# Altium PCB PCB1.PcbDoc (part 1 of 2)
Units mm, origin at the board's own origin, x right, y up, seen from the top; angles counter-clockwise.
Board outline 66.67 x 62.99 mm, 6 copper layers (Top Layer, Signal 1, Signal 2, GND, Power, Bottom Layer), stack 1.313 mm thick; 81 components, 107 nets, 466 pads, 129 vias.
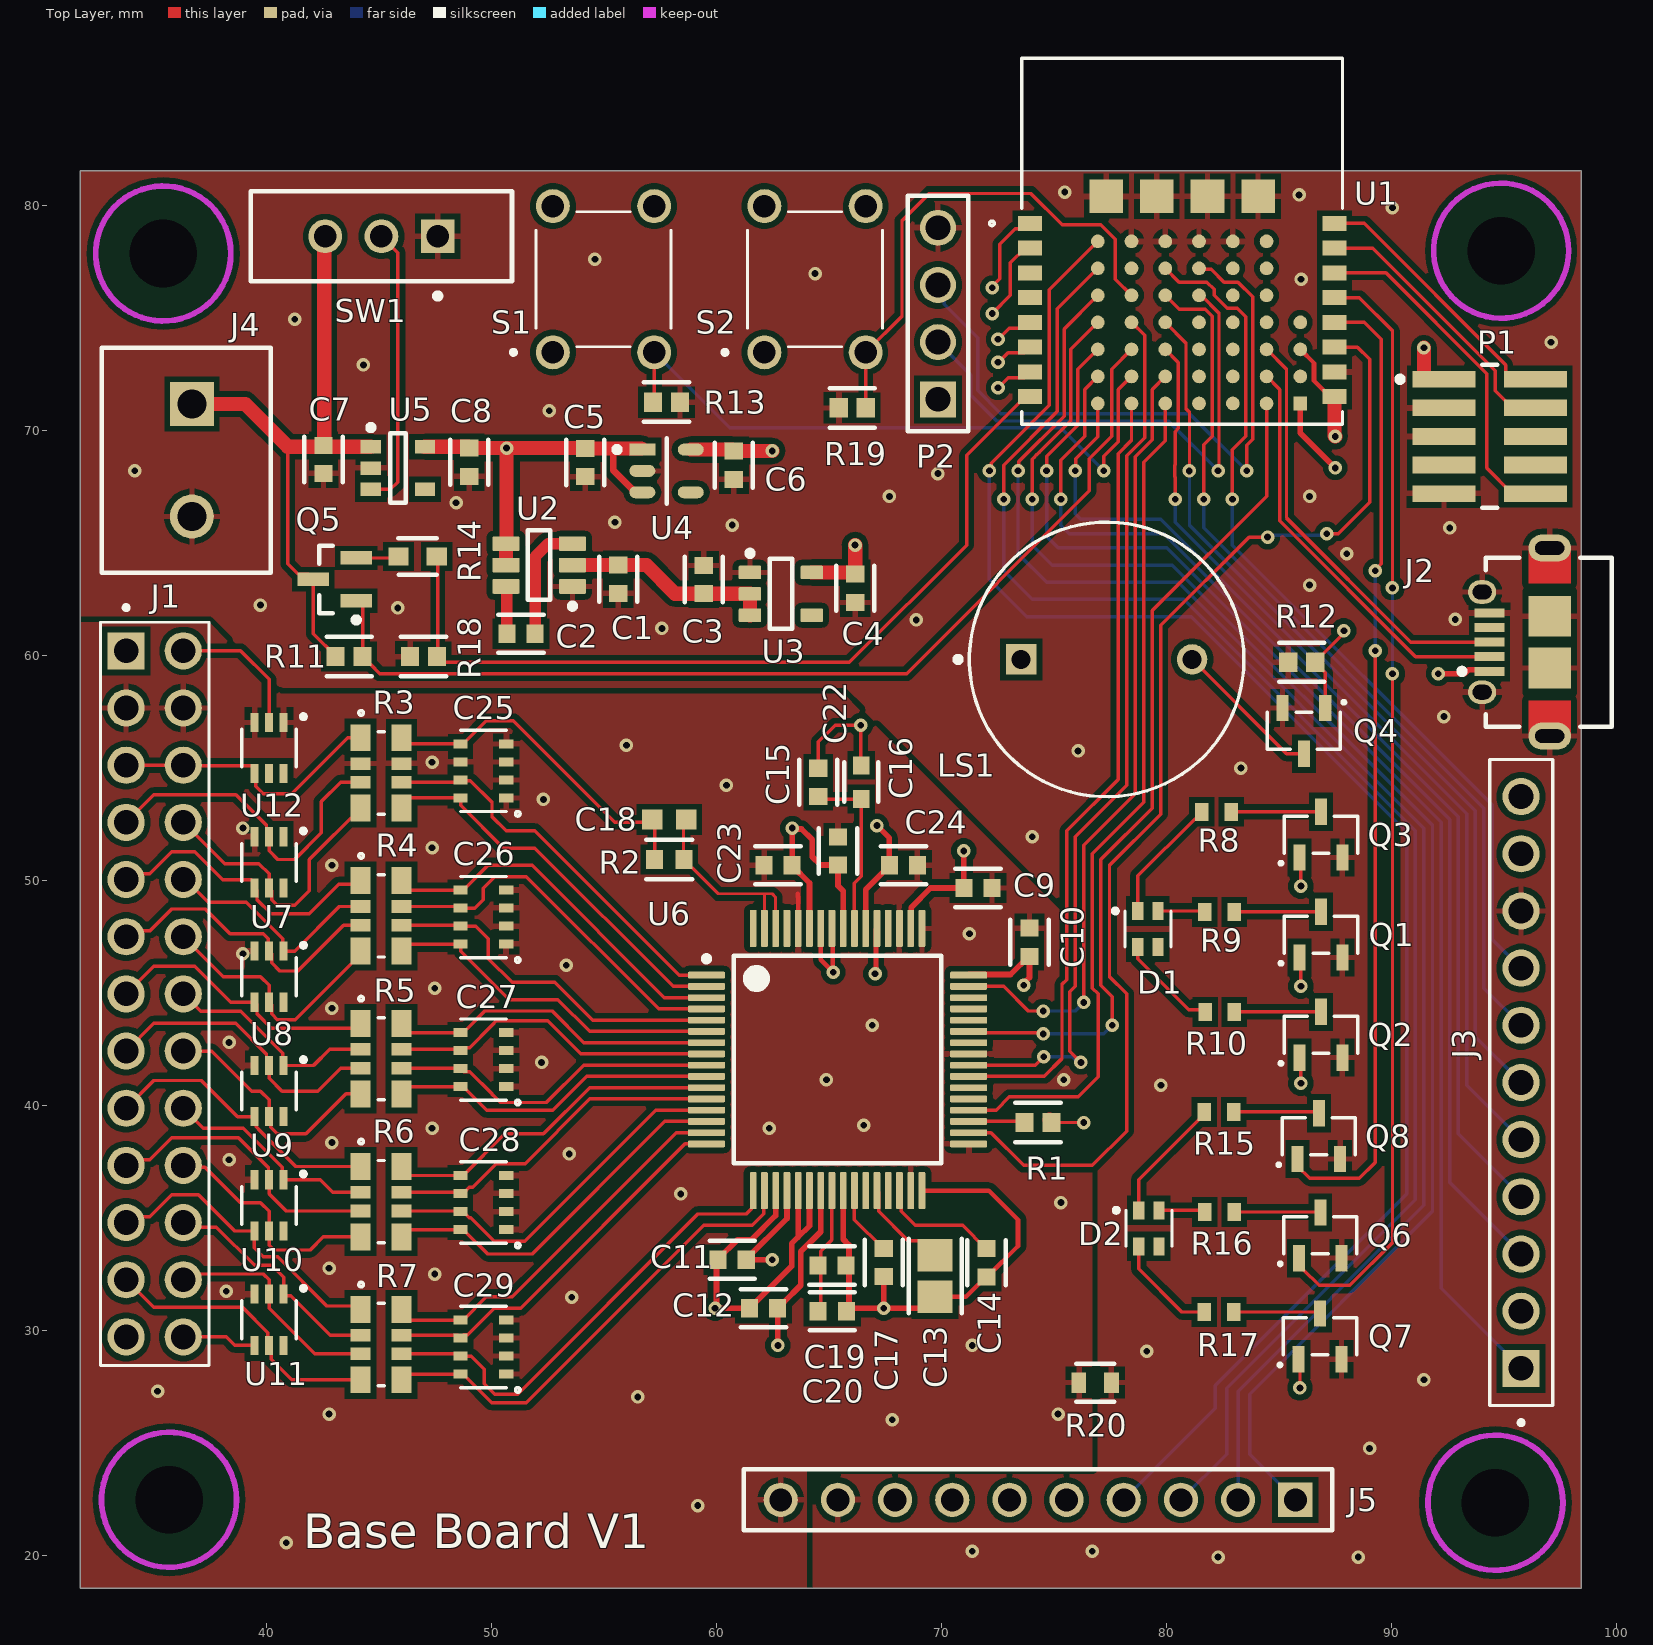
[diagram p0: Top Layer view]
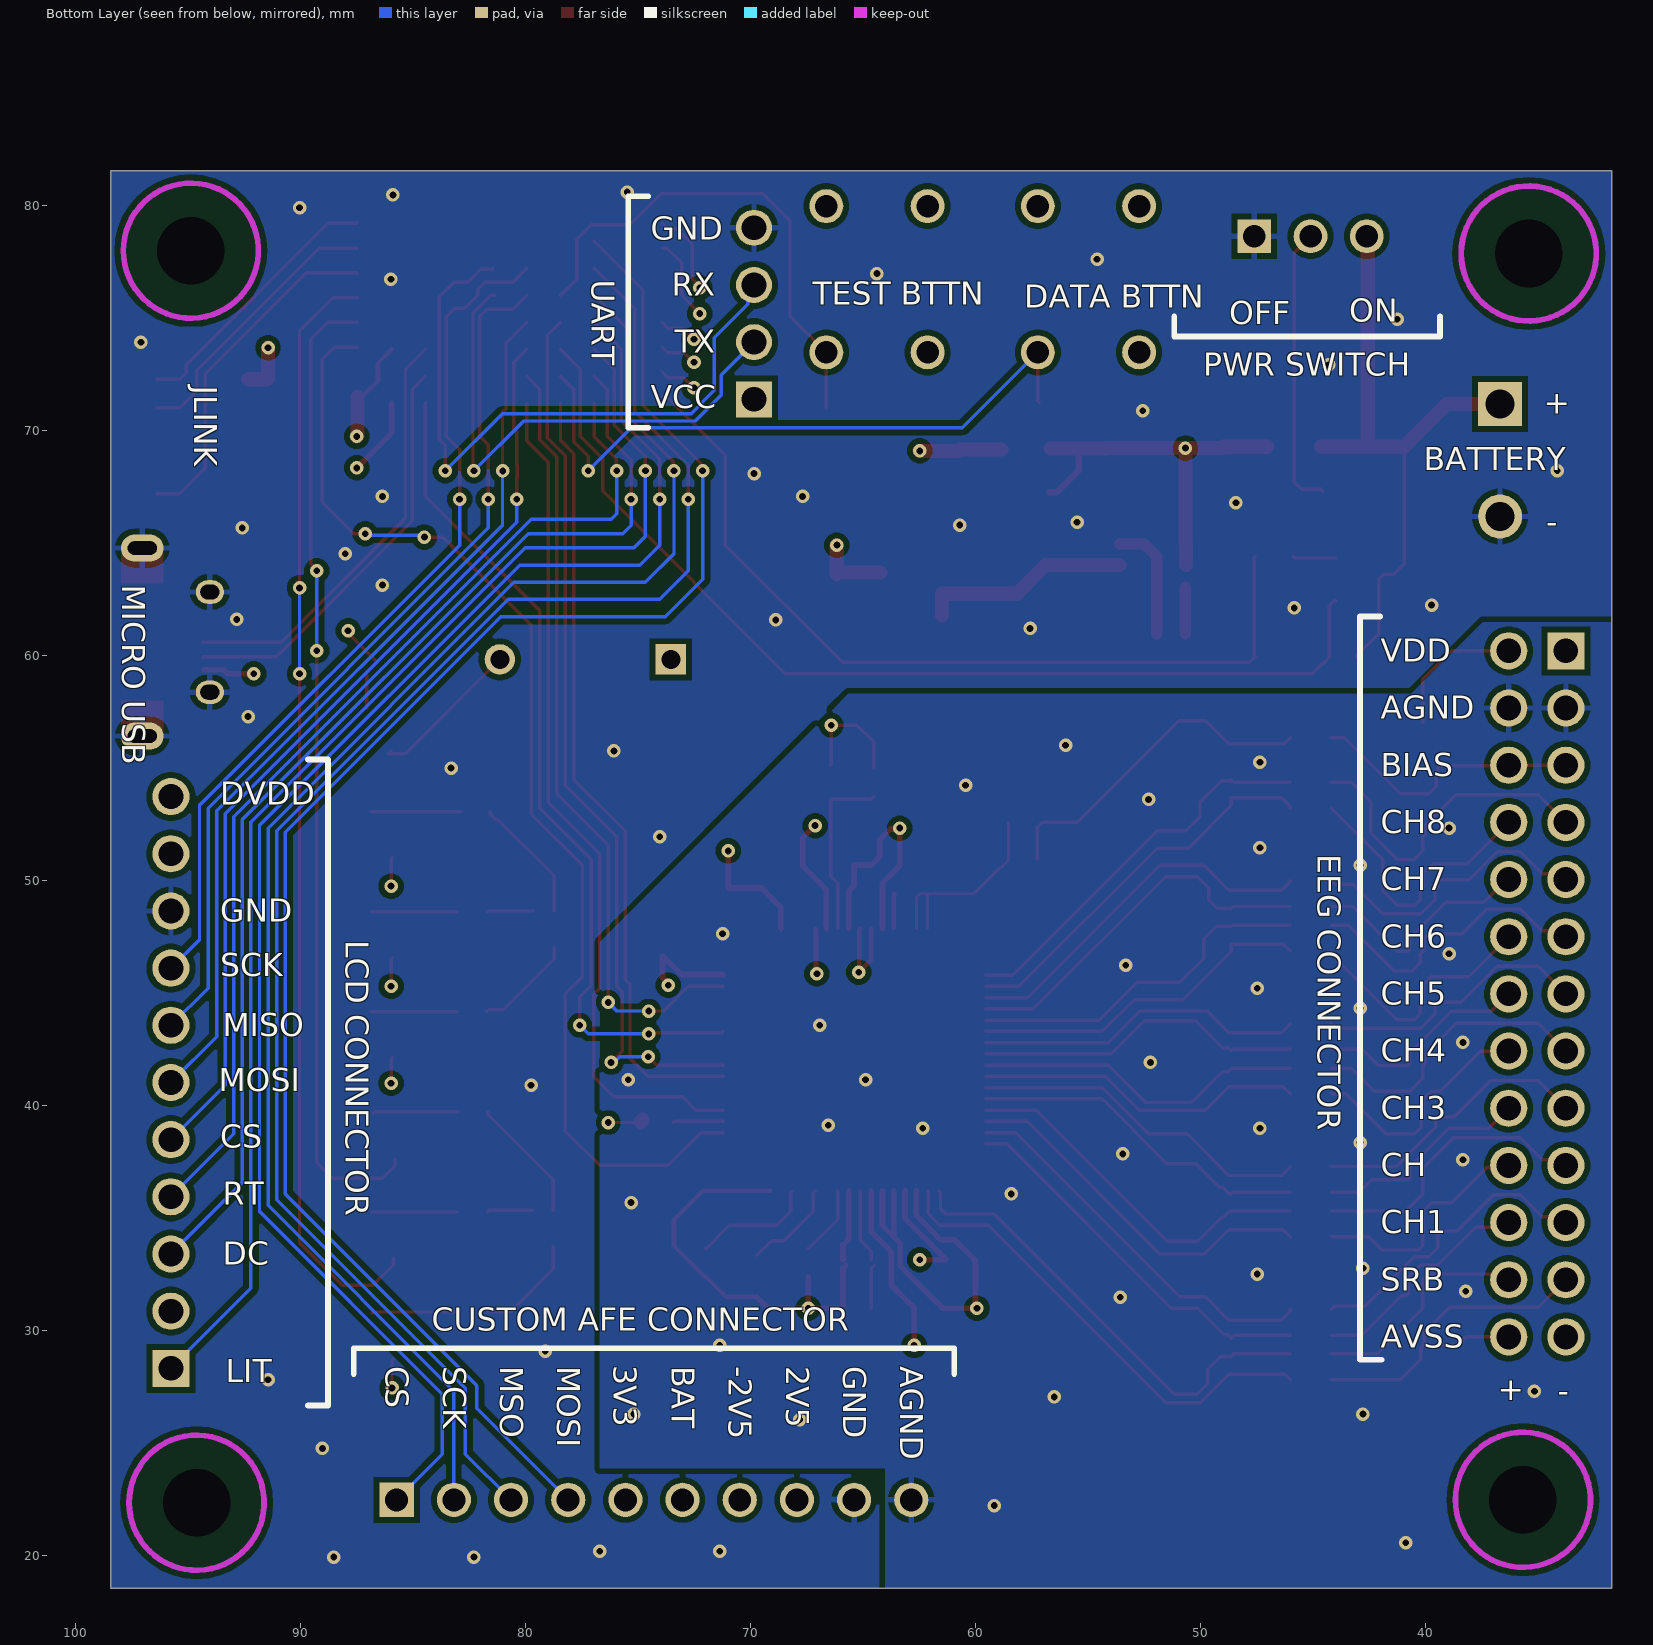
[diagram p1: Bottom Layer view, seen from below]
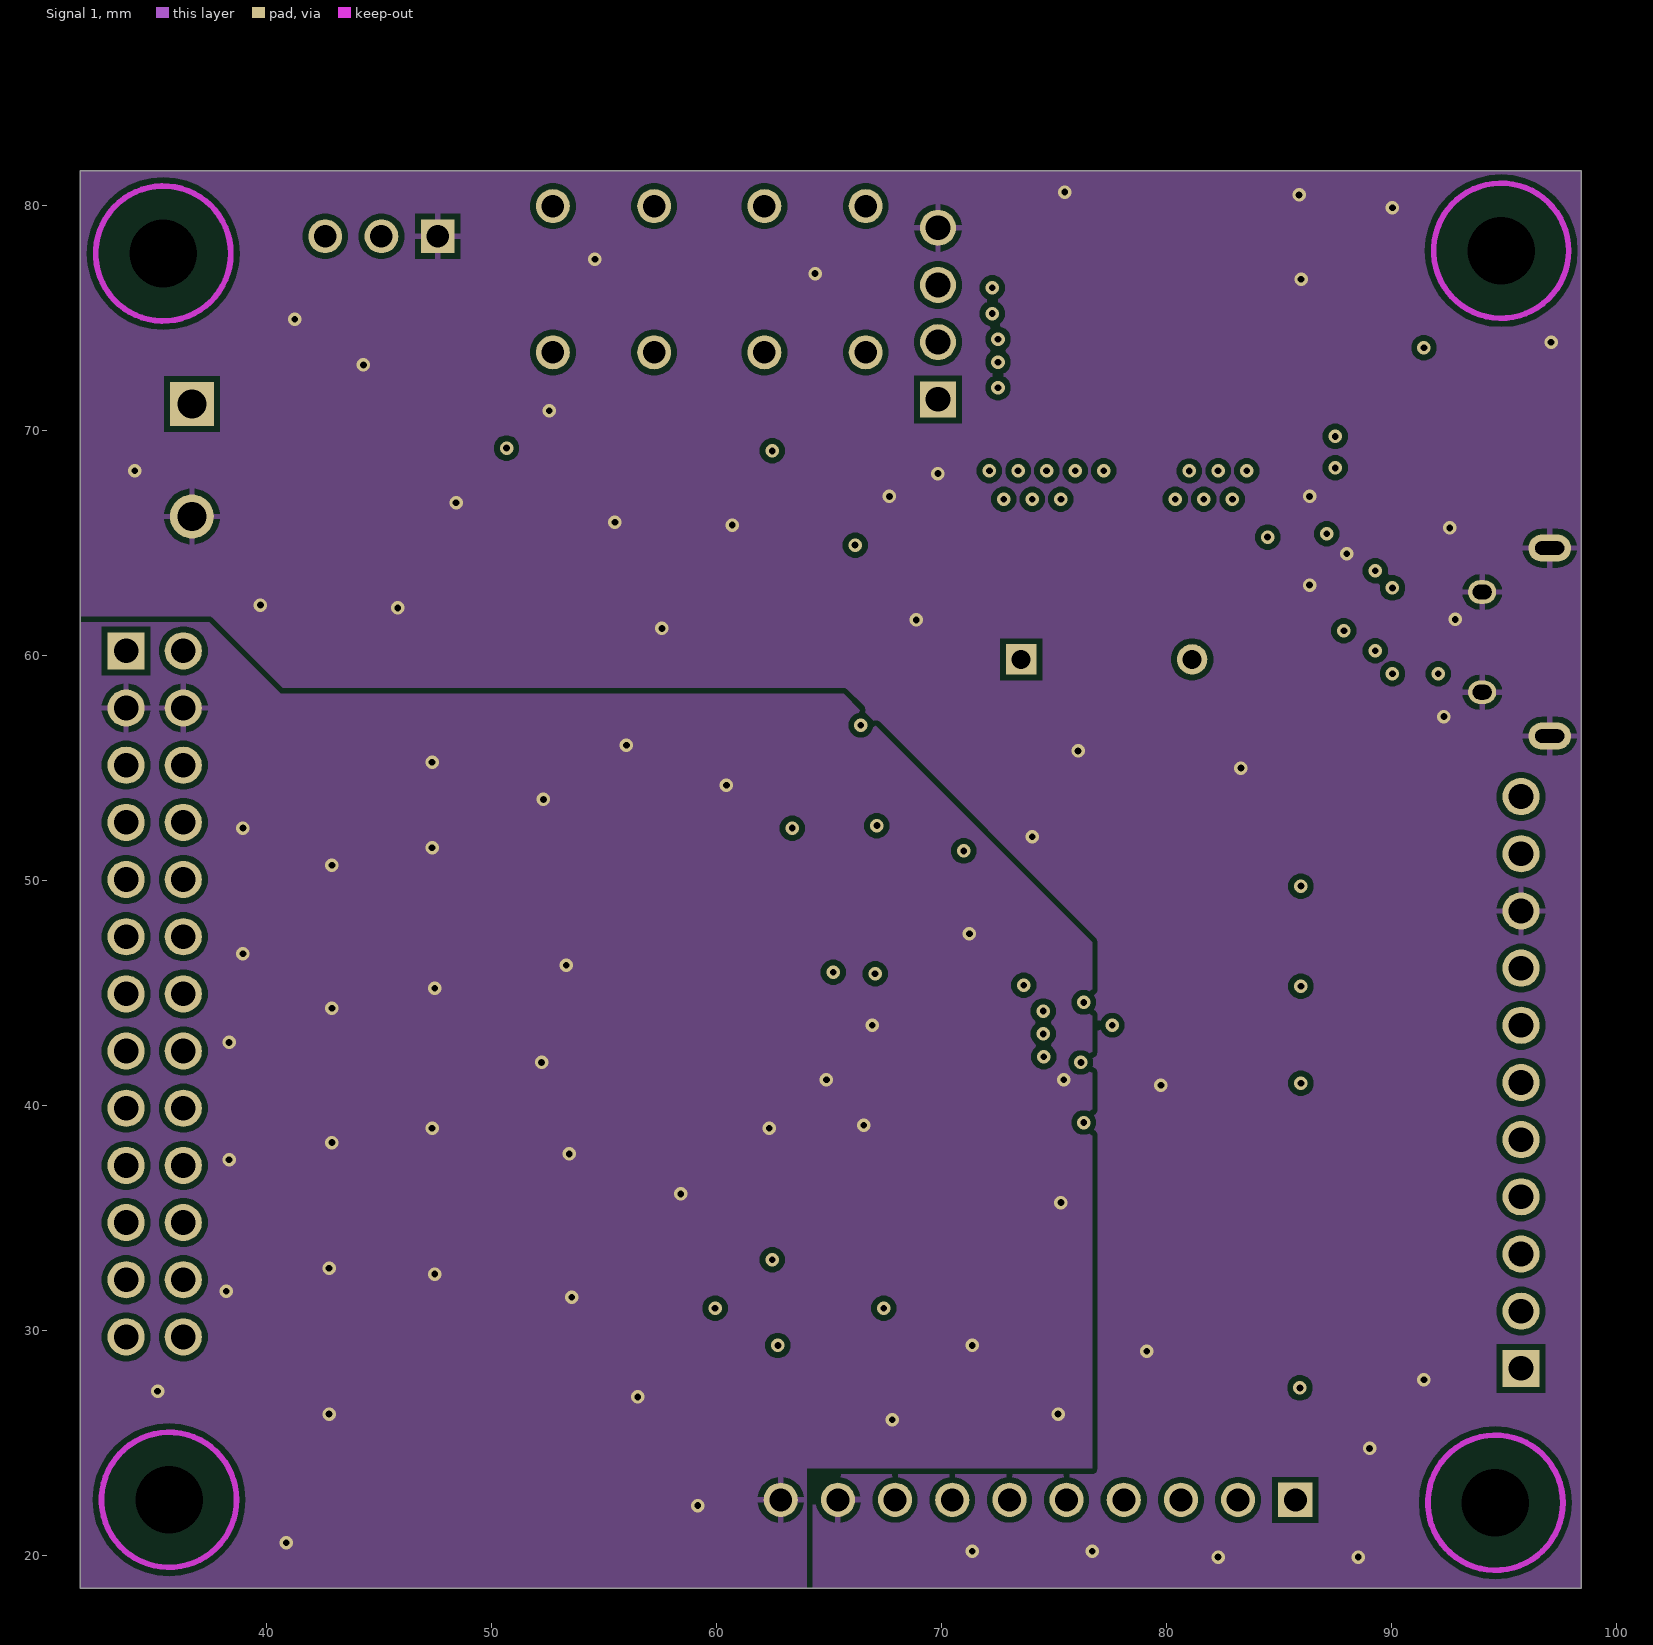
[diagram p2: Signal 1]
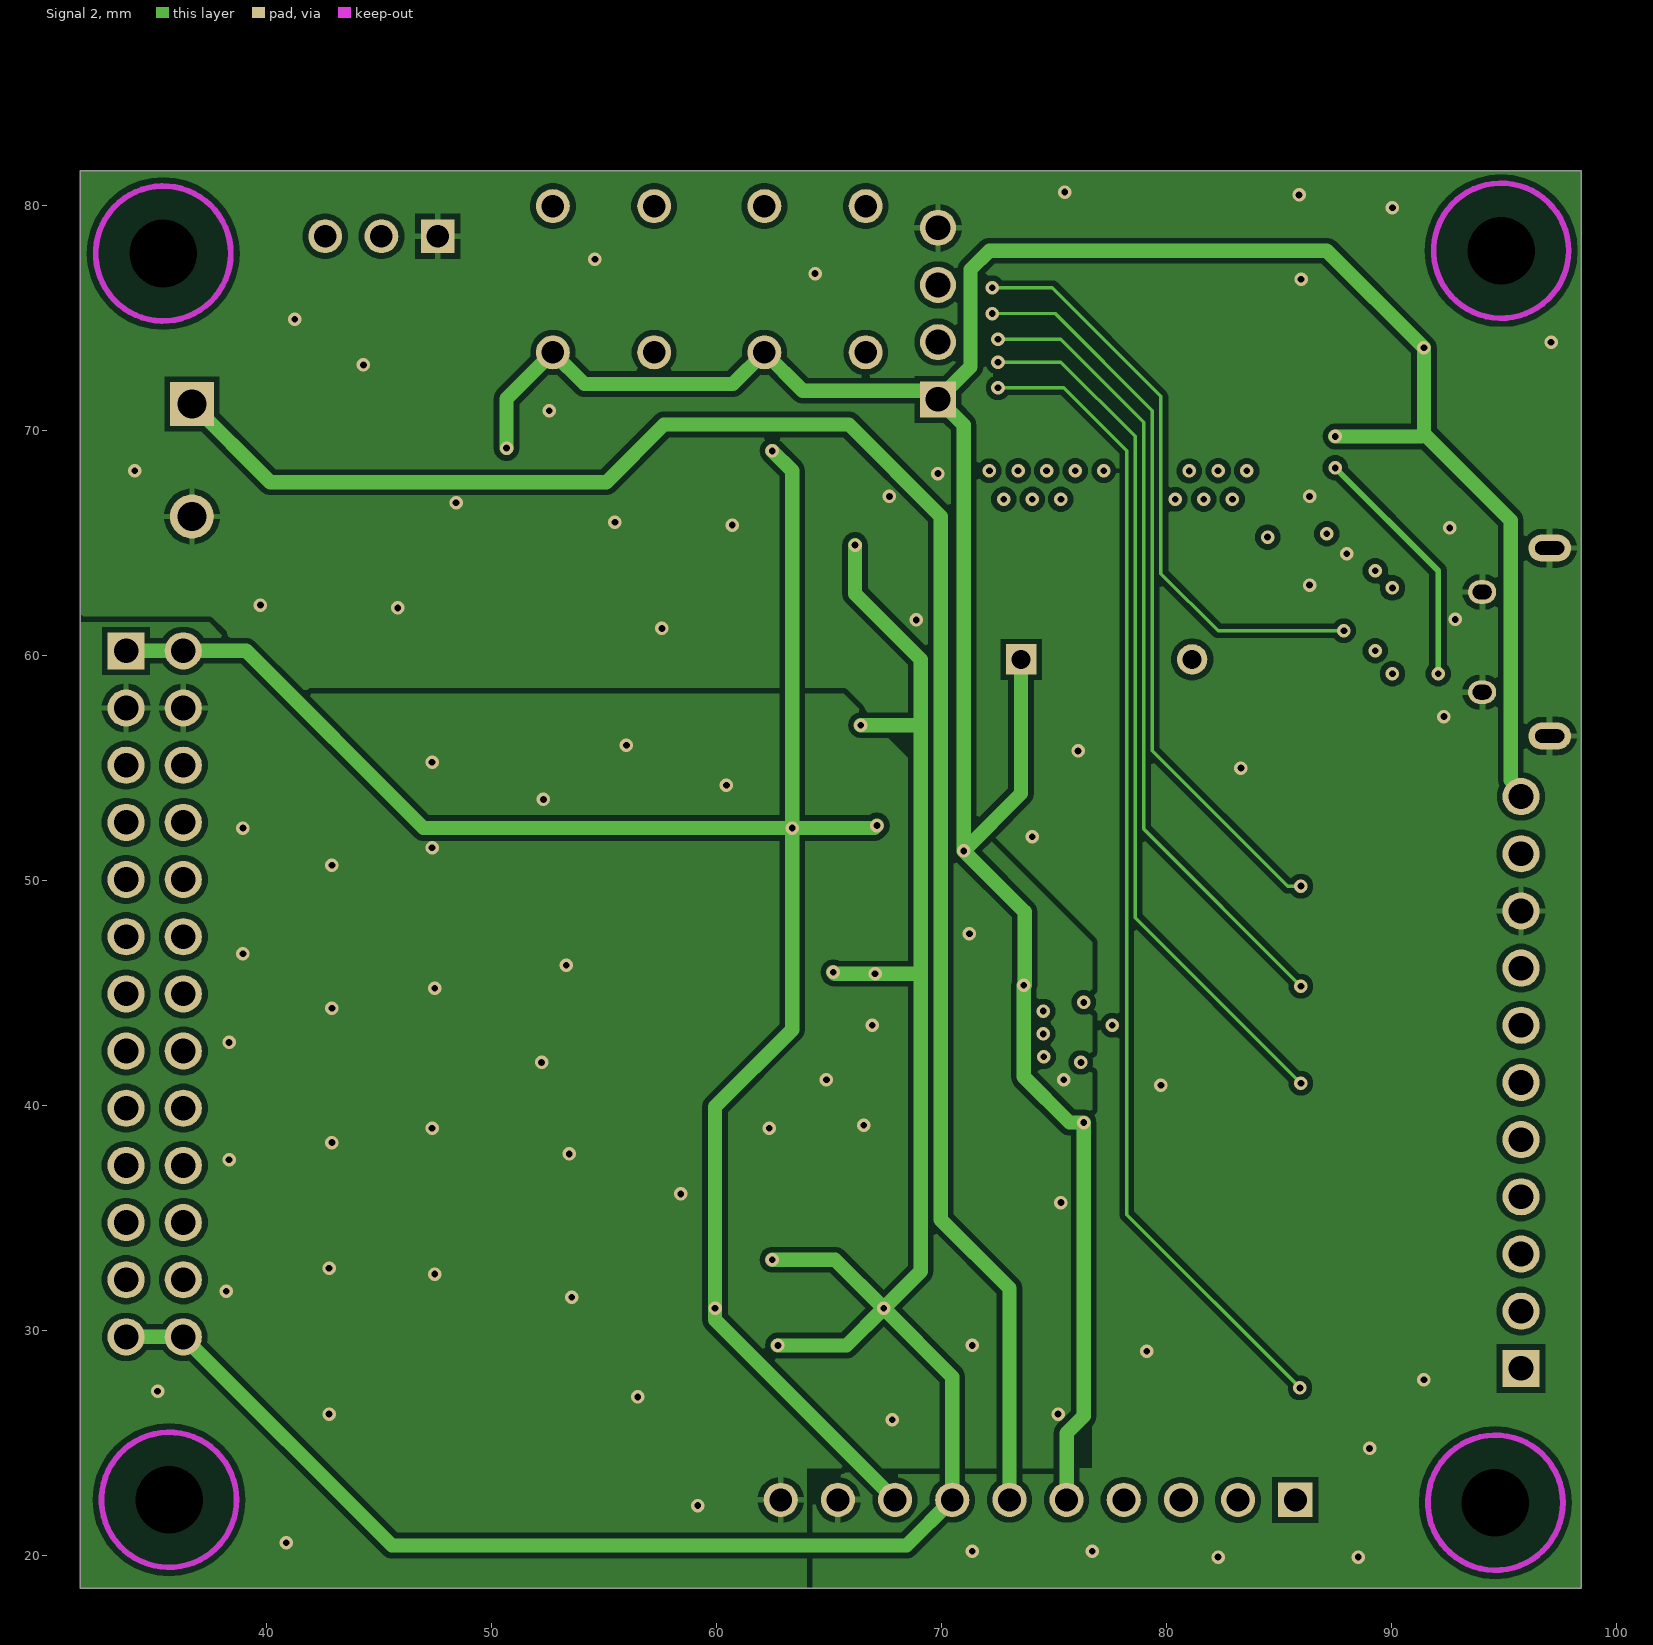
[diagram p3: Signal 2]
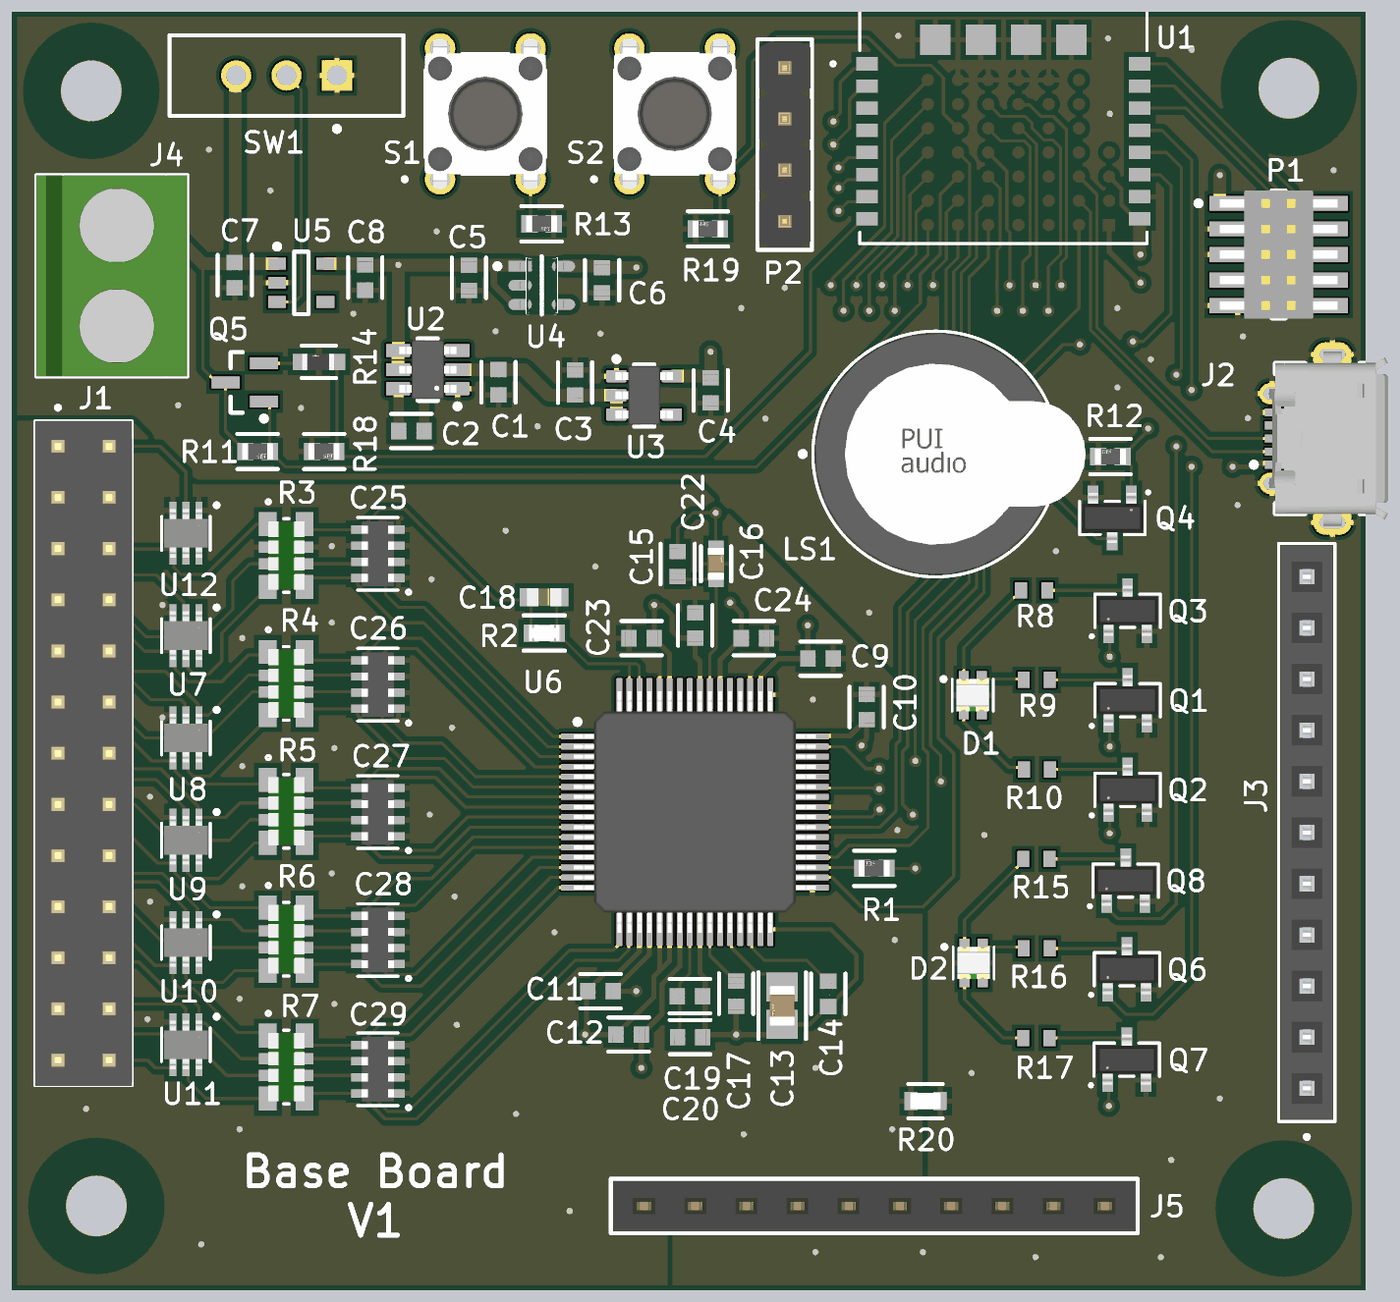
[diagram p5: 3D render of the assembled board from above, using the file's embedded part models]

## Layer stack, top to bottom
Top Solder: solder mask 0.0102, Solder Resist, Dk 3.5
Top Layer: signal copper 0.035
Dielectric 2: prepreg 0.0711, PP-006, Dk 4.1
Signal 1: signal copper 0.0356
Dielectric5: dielectric 0.32, FR-4, Dk 4.8
Signal 2: signal copper 0.0356
Dielectric4: dielectric 0.32, FR-4, Dk 4.8
GND: signal copper 0.035
Dielectric 1: dielectric 0.32, FR-4, Dk 4.8
Power: signal copper 0.035
Dielectric 3: prepreg 0.0711, PP-006, Dk 4.1
Bottom Layer: signal copper 0.035
Bottom Solder: solder mask 0.0102, Solder Resist, Dk 3.5

## Board outline
31.75,18.542 98.425,18.542 98.425,81.534 31.75,81.534

## Design rules (kind name [scope] priority, off if disabled: settings)
Clearance [All] p1: gap=0.254 ignorepadtopadclearanceinfootprint=TRUE except(0: Arc-Hole Track-Hole SMDPad-Hole THPad-Hole Via-Hole Fill-Hole Poly-Hole Region-Hole Text-Hole; 0.127: SMDPad-SMDPad; 0.152: Arc-Arc Arc-Track Track-Track; 0.2: Arc-SMDPad Track-SMDPad; 0.279: Via-Via; 0.33: Arc-THPad Track-THPad; 0.5: THPad-THPad THPad-Via)
DiffPairsRouting [All] p1: maxlimit=0.254 minlimit=0.152 mostfreqgap=0.152 toplayer_minwidth=0.152 toplayer_maxwidth=0.381 toplayer_prefwidth=0.152 midlayer1_minwidth=0.152 midlayer1_maxwidth=0.381 midlayer1_prefwidth=0.152 midlayer2_minwidth=0.152 midlayer2_maxwidth=0.381 midlayer2_prefwidth=0.152 midlayer3_minwidth=0.152 midlayer3_maxwidth=0.381 midlayer3_prefwidth=0.152 midlayer4_minwidth=0.152 midlayer4_maxwidth=0.381 midlayer4_prefwidth=0.152 bottomlayer_minwidth=0.152 bottomlayer_maxwidth=0.381 bottomlayer_prefwidth=0.152 maxuncoupledlength=12.7
HoleSize [All] p1: absolutevalues=TRUE maxlimit=6 minlimit=0.025 maxpercent=80.000 minpercent=20.000
MinimumSolderMaskSliver [All] p1: minsoldermaskwidth=0.08
PlaneConnect [All] p1: pad.planeconnectstyle=Relief pad.reliefexpansion=0.508 pad.reliefentries=4 pad.reliefconductorwidth=0.254 pad.reliefairgap=0.254 via.planeconnectstyle=Direct via.reliefexpansion=0.508 via.reliefentries=4 via.reliefconductorwidth=0.254 via.reliefairgap=0.254
PolygonConnect [All] p1: connectstyle=Relief reliefconductorwidth=0.254 reliefentries=4 polygonreliefangle="90 Angle" airgapwidth=0.254
RoutingVias [All] p1: holewidth=0.3 width=0.6 viastyle="Through Hole" minholewidth=0.3 minwidth=0.6 maxholewidth=6.3 maxwidth=10
SolderMaskExpansion [All] p1: expansion=0.102 istentingtop=FALSE
Width [All] p1: maxlimit=1.27 minlimit=0.102 preferedwidth=0.152
26 further rules are at their usual default settings.

## Classes and differential pairs
component class Power: C1 C2 C3 C4 C5 C6 C7 C8 U2 U3 U4 U5
component class Peripherals: D1 D2 J2 J3 J4 LS1 P1 P2 Q1 Q2 Q3 Q4 Q5 Q6 Q7 Q8 R8 R9 R10 R11 R12 R13 R14 R15 R16 R17 R18 R19 S1 S2 SW1
component class MCU: U1
component class "EEG Inputs": C25 C26 C27 C28 C29 J1 R3 R4 R5 R6 R7 U7 U8 U9 U10 U11 U12
component class AFE: C9 C10 C11 C12 C13 C14 C15 C16 C17 C18 C19 C20 C22 C23 C24 J5 R1 R2 R20 U6
differential pair D: +D_P -D_N

## Components (designator, comment, footprint, x,y, rotation, side; value= is the part's Value field where it differs from the comment)
C1 "CL10A106MQ8NNNC" FP-CL10-IPC_C 55.642,63.381 r270 top
C2 "CL10A106MQ8NNNC" FP-CL10-IPC_C 51.324,60.96 r0 top
C3 "CL10A105KA8NNNC" FP-CL10-IPC_C 59.444,63.365 r90 top
C4 "CL10A105KA8NNNC" FP-CL10-IPC_C 66.175,62.976 r270 top
C5 "CL10A105KA8NNNC" FP-CL10-IPC_C 54.178,68.564 r270 top
C6 "CL10A105KA8NNNC" FP-CL10-IPC_C 60.782,68.445 r270 top
C7 "CL10A105KA8NNNC" FP-CL10-IPC_C 42.553,68.699 r270 top
C8 "CL10A105KA8NNNC" FP-CL10-IPC_C 49.03,68.58 r270 top
C9 "CL10A105KA8NNNC" FP-CL10-IPC_C 71.628,49.657 r0 top
C10 "CL10A105KA8NNNC" FP-CL10-IPC_C 73.914,47.252 r90 top
C11 "CL10A105KA8NNNC" FP-CL10-IPC_C 60.706,33.147 r0 top
C12 "CL10A105KA8NNNC" FP-CL10-IPC_C 62.103,30.988 r0 top
C13 "GRM21BR60E107ME15K" FP-GRM21B-0_2-e0_2_0_7-IPC_A 69.723,32.422 r270 top
C14 "CL10A105KA8NNNC" FP-CL10-IPC_C 72.009,33.012 r270 top
C15 "CL10A105KA8NNNC" FP-CL10-IPC_C 64.535,54.356 r90 top
C16 "KGM15BR71H104JT" FP-0603-L_1_6_0_15-W_0_81-MFG 66.44,54.364 r90 top
C17 "CL10A105KA8NNNC" FP-CL10-IPC_C 67.437,33.02 r270 top
C18 "0603N102F500CT" CAP_0603_S_WAL 57.912,52.705 r180 top
C19 "CL10A106MQ8NNNC" FP-CL10-IPC_C 65.143,32.893 r0 top
C20 "CL10A105KA8NNNC" FP-CL10-IPC_C 65.151,30.861 r0 top
C22 "CL10A105KA8NNNC" FP-CL10-IPC_C 65.405,51.308 r90 top
C23 "CL10A105KA8NNNC" FP-CL10-IPC_C 62.746,50.673 r180 top
C24 "CL10A105KA8NNNC" FP-CL10-IPC_C 68.318,50.673 r0 top
C25 "CA0612KRX7R9BB102" CAP_CA0612_3P2X1P6_YAG 49.657,54.864 r180 top
C26 "CA0612KRX7R9BB102" CAP_CA0612_3P2X1P6_YAG 49.657,48.368 r180 top
C27 "CA0612KRX7R9BB102" CAP_CA0612_3P2X1P6_YAG 49.657,42.037 r180 top
C28 "CA0612KRX7R9BB102" CAP_CA0612_3P2X1P6_YAG 49.657,35.687 r180 top
C29 "CA0612KRX7R9BB102" CAP_CA0612_3P2X1P6_YAG 49.657,29.267 r180 top
D1 "B38G3RGB-10D0003H2U1930" LED_B38G3RGB-10D0003H2U1930 79.179,47.841 r0 top
D2 "B38G3RGB-10D0003H2U1930" LED_B38G3RGB-10D0003H2U1930 79.222,34.544 r0 top
J1 "77313-824-26LF" AMPHENOL_77313-824-26LF 35.052,44.958 r270 top
J2 "47589-0001" MOLX-47589-0001_V 95.528,60.586 r90 top
J3 "PPTC111LFBN-RC" CONN11_PPPN111_SUL 95.758,28.321 r90 top
J4 "691137710002" 691137710002 36.453,68.667 r270 top
J5 "RS1-10-G" 61301011821 74.295,22.479 r180 top
LS1 "AI-1223-TWT-3V-2-R" FP-AI-1223-TWT-3V-2-R-MFG 77.343,59.817 r0 top
P1 "FTSH-105-01-L-DV" SMTC-FTSH-105-01-L-DV_V 94.361,69.723 r270 top
P2 "61300411121" 61300411121 69.85,75.184 r90 top
Q1 "NX6008NBKR" NX6008NBKR_NEX 86.865,47.587 r0 top
Q2 "NX6008NBKR" NX6008NBKR_NEX 86.865,43.142 r0 top
Q3 "NX6008NBKR" NX6008NBKR_NEX 86.865,52.032 r0 top
Q4 "NX6008NBKR" NX6008NBKR_NEX 86.106,56.642 r180 top
Q5 "BSS84AK,215" NXP-SOT23_N 43.053,63.373 r180 top
Q6 "NX6008NBKR" NX6008NBKR_NEX 86.835,34.233 r0 top
Q7 "NX6008NBKR" NX6008NBKR_NEX 86.822,29.743 r0 top
Q8 "NX6008NBKR" NX6008NBKR_NEX 86.769,38.633 r0 top
R1 "RMCF0603FT100K" FP-RMCF0603-IPC_C 74.295,39.243 r180 top
R2 "ERJ-3EKF1004V" FP-ERJ3EK-IPC_C 57.912,50.927 r180 top
R3 "CAY16-2201F4LF" CAY16_BRN 45.11,54.775 r0 top
R4 "CAY16-2201F4LF" CAY16_BRN 45.11,48.425 r0 top
R5 "CAY16-2201F4LF" CAY16_BRN 45.11,42.075 r0 top
R6 "CAY16-2201F4LF" CAY16_BRN 45.11,35.725 r0 top
R7 "CAY16-2201F4LF" CAY16_BRN 45.11,29.375 r0 top
R8 "RC0603JR-0762RL" RESC1608X55X25LL10T15 82.227,53.048 r180 top
R9 "RC0603JR-0762RL" RESC1608X55X25LL10T15 82.354,48.603 r180 top
R10 "RC0603FR-07261RL" RESC1608X55X25LL10T15 82.369,44.158 r180 top
R11 "RMCF0603FT100K" FP-RMCF0603-IPC_C 43.688,59.944 r0 top
R12 "RMCF0603FT100K" FP-RMCF0603-IPC_C 86.013,59.69 r180 top
R13 "RMCF0603FT100K" FP-RMCF0603-IPC_C 57.785,71.247 r0 top
R14 "RT0603FRE07127KL" FP-RT0603-MFG 46.736,64.389 r180 top value=127KΩ
R15 "RC0603JR-0762RL" RESC1608X55X25LL10T15 82.339,39.713 r180 top
R16 "RC0603JR-0762RL" RESC1608X55X25LL10T15 82.354,35.268 r180 top
R17 "RC0603FR-07261RL" RESC1608X55X25LL10T15 82.339,30.823 r180 top
R18 "RMCF0603FT100K" FP-RMCF0603-IPC_C 46.99,59.944 r0 top
R19 "RMCF0603FT100K" FP-RMCF0603-IPC_C 66.04,70.993 r180 top
R20 "RMCF0603ZT0R00" FP-RMCF0603-MFG 76.835,27.686 r180 top value=0mΩ
S1 "TS02-66-70-BK-160-LCR-D" SW_TS02-66-70-BK-160-LCR-D 54.991,76.708 r90 top
S2 "TS02-66-70-BK-160-LCR-D" SW_TS02-66-70-BK-160-LCR-D 64.389,76.708 r90 top
SW1 "EG1218" ESWI-EG1218_V 45.125,78.613 r180 top
U1 "BT40" BT40E_FAN_FNL 80.699,78.391 r0 top
U2 "LM2664M6X/NOPB" DBV0006A_M 52.135,64.008 r180 top
U3 "TPS72325DBVR" DBV0005A_N 62.873,62.73 r0 top
U4 "MIC5504-2.5YM5-TR" FP-SOT23-5LD-PL-1-IPC_C 57.793,68.191 r0 top
U5 "MCP1754T-3302E/OT" MCHP-SOT-23-OT5_L 45.855,68.318 r0 top
U6 "ADS1299IPAGR" PAG0064A_M 65.388,42.041 r0 top
U7 "TPD4E1B06DCKR" DCK6_TEX 40.132,50.8 r270 top
U8 "TPD4E1B06DCKR" DCK6_TEX 40.132,45.72 r270 top
U9 "TPD4E1B06DCKR" DCK6_TEX 40.132,40.64 r270 top
U10 "TPD4E1B06DCKR" DCK6_TEX 40.132,35.56 r270 top
U11 "TPD4E1B06DCKR" DCK6_TEX 40.132,30.48 r270 top
U12 "TPD4E1B06DCKR" DCK6_TEX 40.132,55.88 r270 top

## Footprints (in the part's own frame and the unit in brackets; to place one, negate y for a bottom-side part, rotate by r counter-clockwise, add the part's x,y. Pads: shape width x height; smd on the part's side, far side on the other; paste and mask are expansions set on the pad)
61300411121 [mm] "Pin Header, pitch 2.54 mm, THT, Vertical, single row, 4p"
  rect 1.6x1.6 hole 1.1: 1(-3.81,0)
  round 1.6 hole 1.1: 2(-1.27,0) 3(1.27,0) 4(3.81,0)
  silkscreen extent -5.23,-1.35 5.23,1.35, body extent -5.08,-1.27 5.08,1.27, height 8.57
61301011821 [mm] "Socket Header, Pitch 2.54 mm, THT, Vertical, single row, 10p"
  rect 1.52x1.52 hole 1.02: 1(-11.43,0)
  round 1.52 hole 1.02: 2(-8.89,0) 3(-6.35,0) 4(-3.81,0) 5(-1.27,0) 6(1.27,0) 7(3.81,0) 8(6.35,0) 9(8.89,0) 10(11.43,0)
  silkscreen extent -13.08,-1.35 13.08,1.35, body extent -12.95,-1.25 12.95,1.25, height 8.55
691137710002 [mm] "Horizontal Cable Entry with Pressure Clamp, pitch 5mm, 02p"
  rect 1.95x1.95 hole 1.3: 1(-2.5,0.25)
  round 1.95 hole 1.3: 2(2.5,0.25)
  silkscreen extent -5,-3.75 5,3.75, body extent -5,-3.75 5,3.75, height 11.6
AMPHENOL_77313-824-26LF [mm]
  rect 1.65x1.65 hole 1.1: 01(-15.24,-1.27)
  round 1.65 hole 1.1: 02(-15.24,1.27) 03(-12.7,-1.27) 04(-12.7,1.27) 05(-10.16,-1.27) 06(-10.16,1.27) 07(-7.62,-1.27) 08(-7.62,1.27) 09(-5.08,-1.27) 10(-5.08,1.27) 11(-2.54,-1.27) 12(-2.54,1.27) 13(0,-1.27) 14(0,1.27) 15(2.54,-1.27) 16(2.54,1.27) 17(5.08,-1.27) 18(5.08,1.27) 19(7.62,-1.27) 20(7.62,1.27) 21(10.16,-1.27) 22(10.16,1.27) 23(12.7,-1.27) 24(12.7,1.27) 25(15.24,-1.27) 26(15.24,1.27)
  silkscreen extent -17.26,-2.41 16.51,2.41, body extent -16.51,-2.41 16.51,2.41, height 9.3
BT40E_FAN_FNL [mil]
  rect 42x26 smd paste+0 mask+0: 1(-266.5,31.5) 2(-266.5,-11.81) 3(-266.5,-55.12) 4(-266.5,-98.43) 5(-266.5,-141.73) 6(-266.5,-185.04) 7(-266.5,-228.35) 8(-266.5,-271.65) 9(266.5,-271.65) 10(266.5,-228.35) 11(266.5,-185.04) 12(266.5,-141.73) 13(266.5,-98.43) 14(266.5,-55.12) 15(266.5,-11.81) 16(266.5,31.5)
  round 24 smd paste-12 mask-12: A0(-88.58,0) A1(-88.58,-47.24) A2(-88.58,-94.49) A3(-88.58,-141.73) A4(-88.58,-188.98) A5(-88.58,-236.22) A6(-88.58,-283.46) B0(-29.53,0) B1(-29.53,-47.24) B2(-29.53,-94.49) B3(-29.53,-141.73) B4(-29.53,-188.98) B5(-29.53,-236.22) B6(-29.53,-283.46) C0(29.53,0) C1(29.53,-47.24) C2(29.53,-94.49) C3(29.53,-141.73) C4(29.53,-188.98) C5(29.53,-236.22) C6(29.53,-283.46) D0(88.58,0) D1(88.58,-47.24) D2(88.58,-94.49) D3(88.58,-141.73) D4(88.58,-188.98) D5(88.58,-236.22) D6(88.58,-283.46) E0(147.64,0) E1(147.64,-47.24) E2(147.64,-94.49) E3(147.64,-141.73) E4(147.64,-188.98) E5(147.64,-236.22) E6(147.64,-283.46) F3(206.69,-141.73) F4(206.69,-188.98) F5(206.69,-236.22) Z0(-147.64,0) Z1(-147.64,-47.24) Z2(-147.64,-94.49) Z3(-147.64,-141.73) Z4(-147.64,-188.98) Z5(-147.64,-236.22) Z6(-147.64,-283.46)
  rect 24x24 smd paste-12 mask-12: F6(206.69,-283.46)
  rect 59x59 smd paste+0 mask+0: H0(-132.87,78.74) H1(-44.29,78.74) H2(44.29,78.74) H3(132.87,78.74)
  silkscreen extent -337,-320 280,320, body extent -280,-320 280,320, height 79
CAP_0603_S_WAL [mil]
  rect 36x35 smd paste+0 mask+0: 1(-29.5,0) 2(29.5,0)
  body extent -34,-17 34,17, height 34
CAP_CA0612_3P2X1P6_YAG [mil]
  rect 25x16 smd paste+0 mask+0: 1(-40,47.24) 2(-40,15.75) 3(-40,-15.75) 4(-40,-47.24) 5(40,-47.24) 6(40,-15.75) 7(40,15.75) 8(40,47.24)
  silkscreen extent -64,-71 40,79, body extent -31,-63 31,63, height 35
CAY16_BRN [mil]
  rect 35x47 smd paste+0 mask+0: 1(-36,61.5) 4(-36,-61.5) 5(36,-61.5) 8(36,61.5)
  rect 35x22 smd paste+0 mask+0: 2(-36,16.33) 3(-36,-16.33) 6(36,-16.33) 7(36,16.33)
  silkscreen extent -39,-72 5,109, body extent -36,-67 36,67, height 24
CONN11_PPPN111_SUL [mm]
  rect 1.65x1.65 hole 1.1 paste-2539.97: 1(0,0)
  round 1.65 hole 1.1 paste-2539.97: 2(2.54,0) 3(5.08,0) 4(7.62,0) 5(10.16,0) 6(12.7,0) 7(15.24,0) 8(17.78,0) 9(20.32,0) 10(22.86,0) 11(25.4,0)
  silkscreen extent -2.51,-1.4 27.05,1.4, body extent -1.52,-1.27 26.92,1.27, height 8.51
DBV0005A_N [mm] "SOT23, 5-Leads, Body 3.05x1.75mm, Pitch 0.95mm, IPC Medium Density"
  rrect17% 1x0.6 smd: 1(-1.375,0.95) 2(-1.375,0) 3(-1.375,-0.95) 4(1.375,-0.95) 5(1.375,0.95)
  silkscreen extent -1.5,-1.55 0.5,1.92, body extent -1.42,-1.46 1.42,1.46, height 1.08
DBV0006A_M [mm] "SOT23, 6-Leads, Body 3.05x1.75mm, Pitch 0.95mm, IPC Low Density"
  rrect15% 1.2x0.65 smd: 1(-1.475,0.95) 2(-1.475,0) 3(-1.475,-0.95) 4(1.475,-0.95) 5(1.475,0) 6(1.475,0.95)
  silkscreen extent -1.6,-1.55 0.5,1.95, body extent -1.42,-1.46 1.42,1.46, height 1.11
DCK6_TEX [mil]
  rect 33.5x14 smd paste+0 mask+0: 1(-44.75,25.59) 2(-44.75,0) 3(-44.75,-25.59) 4(44.75,-25.59) 5(44.75,0) 6(44.75,25.59)
  silkscreen extent -59,-48 33,64, body extent -48,-43 48,43, height 43
ESWI-EG1218_V [mm] "THD, 3-Leads, Body 11.6x4mm, Pitch 2.5mm"
  rect 1.5x1.5 hole 1: 1(-2.5,0)
  round 1.5 hole 1: 2(0,0) 3(2.5,0)
  silkscreen extent -5.8,-2 5.8,2.77, body extent -5.8,-2 5.8,2, height 7.4
FP-0603-L_1_6_0_15-W_0_81-MFG [mm]
  rect 0.8x0.75 smd paste+0 mask+0: 1(-0.75,0) 2(0.75,0)
  silkscreen extent -0.87,-0.75 0.87,0.75, body extent -1.25,-0.58 1.25,0.58, height 0.25
FP-AI-1223-TWT-3V-2-R-MFG [mm]
  rect 1.35x1.35 hole 0.85 paste-2539.97 mask+0: 1(-3.8,0)
  round 1.35 hole 0.85 paste-2539.97 mask+0: 2(3.8,0)
  silkscreen extent -6.72,-6.1 6.1,6.1, body extent -6.2,-6.2 6.2,6.2, height 0.25
FP-CL10-IPC_C [mm]
  rect 0.758x0.812 smd paste+0 mask+0: 1(-0.627,0) 2(0.627,0)
  silkscreen extent -1.01,-0.85 1.01,0.85, body extent -1.11,-0.55 1.11,0.55, height 0.25
FP-ERJ3EK-IPC_C [mm]
  rect 0.757x0.862 smd paste+0 mask+0: 1(-0.651,0) 2(0.651,0)
  silkscreen extent -1.03,-0.87 1.03,0.87, body extent -1.13,-0.58 1.13,0.58, height 0.25
FP-GRM21B-0_2-e0_2_0_7-IPC_A [mm]
  rect 1.455x1.556 smd paste+0 mask+0: 1(-0.926,0) 2(0.926,0)
  silkscreen extent -1.65,-1.18 1.65,1.18, body extent -2.15,-1.28 2.15,1.28, height 0.25
FP-RMCF0603-IPC_C [mm]
  rect 0.806x0.858 smd paste+0 mask+0: 1(-0.601,0) 2(0.601,0)
  silkscreen extent -1,-0.87 1,0.87, body extent -1.1,-0.58 1.1,0.58, height 0.25
FP-RMCF0603-MFG [mm]
  rect 0.65x0.9 smd paste+0 mask+0: 1(-0.725,0) 2(0.725,0)
  silkscreen extent -0.85,-0.85 0.85,0.85, body extent -1.15,-0.58 1.15,0.58, height 0.25
FP-RT0603-MFG [mm]
  rect 0.9x0.8 smd paste+0 mask+0: 1(-0.85,0) 2(0.85,0)
  silkscreen extent -0.85,-0.81 0.86,0.8, body extent -1.4,-0.55 1.4,0.55, height 0.25
FP-SOT23-5LD-PL-1-IPC_C [mm]
  rect 1.156x0.53 smd paste+0 mask+0: 1(-1.075,0.95)
  rrect100% 1.156x0.53 smd paste+0 mask+0: 2(-1.075,0) 3(-1.075,-0.95) 4(1.075,-0.95) 5(1.075,0.95)
  silkscreen extent -2.33,-1.45 0,1.45, body extent -1.75,-1.55 1.75,1.55, height 0.25
LED_B38G3RGB-10D0003H2U1930 [mm]
  rect 0.5x0.8 smd: 1(-0.45,0.8) 2(0.45,0.8) 3(0.45,-0.8) 4(-0.45,-0.8)
  silkscreen extent -1.55,-0.8 1.02,0.9, body extent -0.8,-0.8 0.8,0.8, height 0.4
MCHP-SOT-23-OT5_L [mm] "SOT23, 5-Leads, Body 2.9x1.55mm, Pitch 0.95mm, IPC High Density"
  rect 0.9x0.6 smd: 1(-1.2,0.95) 2(-1.2,0) 3(-1.2,-0.95) 4(1.2,-0.95) 5(1.2,0.95)
  silkscreen extent -1.32,-1.55 0.35,1.92, body extent -0.9,-1.55 0.9,1.55, height 1.45
MOLX-47589-0001_V [mm] "SMD, 5-Leads, Body 7.5x5.6mm, Pitch 0.65mm"
  rect 0.4x1.35 smd: 1(-1.3,1.175) 2(-0.65,1.175) 3(0,1.175) 4(0.65,1.175) 5(1.3,1.175)
  oval 1.05x1.25 hole 0.65 slot 0.85 at 90 deg: 6(-2.225,1.5) 7(2.225,1.5)
  oval 1.2x1.9 hole 0.6 slot 1.3 at 90 deg: 8(-4.175,-1.5) 11(4.175,-1.5)
  rect 1.8x1.9 smd: 9(-1.15,-1.5) 10(1.15,-1.5)
  Top Layer region: 2.6,-2.45 4.175,-2.45 4.175,-0.55 2.6,-0.55
  Top Layer region: -2.6,-0.55 -4.175,-0.55 -4.175,-2.45 -2.6,-2.45
  silkscreen extent -3.75,-4.25 3.75,2.52, body extent -4.32,-4.25 4.32,1.64, height 2.74
NX6008NBKR_NEX [mil]
  rect 21x46 smd paste+0 mask+0: 1(-37.4,-40) 2(37.4,-40) 3(0,40)
  silkscreen extent -73,-53 64,32, body extent -59,-49 59,49, height 43
NXP-SOT23_N [mm] "SOT23, 3-Leads, Body 3x1.4mm, Pitch 0.95mm, IPC Medium Density"
  rect 1.4x0.6 smd: 1(-0.95,0.95) 2(-0.95,-0.95) 3(0.95,0)
  silkscreen extent -1.08,-1.5 0.7,1.92, body extent -0.7,-1.5 0.7,1.5, height 1.1
PAG0064A_M [mm] "QFP, 64-Leads, Body 10x10mm, Pitch 0.5mm, IPC Low Density"
  rrect33% 1.65x0.3 smd: 1(-5.825,3.75) 2(-5.825,3.25) 3(-5.825,2.75) 4(-5.825,2.25) 5(-5.825,1.75) 6(-5.825,1.25) 7(-5.825,0.75) 8(-5.825,0.25) 9(-5.825,-0.25) 10(-5.825,-0.75) 11(-5.825,-1.25) 12(-5.825,-1.75) 13(-5.825,-2.25) 14(-5.825,-2.75) 15(-5.825,-3.25) 16(-5.825,-3.75) 33(5.825,-3.75) 34(5.825,-3.25) 35(5.825,-2.75) 36(5.825,-2.25) 37(5.825,-1.75) 38(5.825,-1.25) 39(5.825,-0.75) 40(5.825,-0.25) 41(5.825,0.25) 42(5.825,0.75) 43(5.825,1.25) 44(5.825,1.75) 45(5.825,2.25) 46(5.825,2.75) 47(5.825,3.25) 48(5.825,3.75)
  rrect33% 0.3x1.65 smd: 17(-3.75,-5.825) 18(-3.25,-5.825) 19(-2.75,-5.825) 20(-2.25,-5.825) 21(-1.75,-5.825) 22(-1.25,-5.825) 23(-0.75,-5.825) 24(-0.25,-5.825) 25(0.25,-5.825) 26(0.75,-5.825) 27(1.25,-5.825) 28(1.75,-5.825) 29(2.25,-5.825) 30(2.75,-5.825) 31(3.25,-5.825) 32(3.75,-5.825) 49(3.75,5.825) 50(3.25,5.825) 51(2.75,5.825) 52(2.25,5.825) 53(1.75,5.825) 54(1.25,5.825) 55(0.75,5.825) 56(0.25,5.825) 57(-0.25,5.825) 58(-0.75,5.825) 59(-1.25,5.825) 60(-1.75,5.825) 61(-2.25,5.825) 62(-2.75,5.825) 63(-3.25,5.825) 64(-3.75,5.825)
  silkscreen extent -5.95,-4.6 4.6,4.6, body extent -6,-6 6,6, height 1.09
RESC1608X55X25LL10T15 [mm] "Chip Resistor, 2-Leads, Body 1.60x0.80mm, IPC High Density"
  rect 0.6x0.8 smd: 1(-0.65,0) 2(0.65,0)
  body extent -0.85,-0.45 0.85,0.45, height 0.55
SMTC-FTSH-105-01-L-DV_V [mm] "CONN, 10-Leads, Body 6.35x3.43mm, Pitch 1.27mm"
  rect 0.74x2.79 smd: 1(-2.54,-2.035) 2(-2.54,2.035) 3(-1.27,-2.035) 4(-1.27,2.035) 5(0,-2.035) 6(0,2.035) 7(1.27,-2.035) 8(1.27,2.035) 9(2.54,-2.035) 10(2.54,2.035)
  silkscreen extent -3.17,-4.1 3.17,0.34, body extent -3.17,-2.92 3.18,2.92, height 5.96
SW_TS02-66-70-BK-160-LCR-D [mm]
  round 1.508 hole 1: 1(-3.25,2.25) 2(3.25,2.25) 3(-3.25,-2.25) 4(3.25,-2.25)
  silkscreen extent -3.35,-3 3,4.1, body extent -3.95,-3 3.95,3, height 7

## Part data
C1 C2 C19: library part CMP-13271-001938-1, "Cap Ceramic 10uF 6.3V X5R ±20% Pad SMD 0603 +85°C T/R", Capacitance=10uF, Case Code (Imperial)=0603, Case Code (Metric)=1608, Dielectric=X5R, Max Operating Temperature=85°C, Min Operating Temperature=-55°C, Package Quantity=1, Tolerance=20%, Voltage=6.3V, Case/Package=0603, Contact Plating=Tin, Depth=0.8mm, Height=0.8mm, Length=1.6mm, Mount="Surface Mount", Packaging="Tape and Reel", Radiation Hardening=No, Thickness=0.035inch, Voltage Rating=6.3V, Width=0.031inch
C3 C4 C5 C6 C7 C8 C9 C10 C11 C12 C14 C15 C17 C20 C22 C23 C24: library part CMP-13271-004127-1, "Cap Ceramic 1uF 25V X5R ±10% Pad SMD 0603 +85°C T/R", Capacitance=1uF, Case Code (Imperial)=0603, Case Code (Metric)=1608, Dielectric=X5R, Max Operating Temperature=85°C, Min Operating Temperature=-55°C, Package Quantity=1, Tolerance=10%, Voltage=25V, Case/Package=0603, Contact Plating=Tin, Depth=0.8mm, Height=0.8mm, Lead Free="Lead Free", Length=1.6mm, Material=Ceramic, Mount="Surface Mount", Packaging="Tape and Reel", Radiation Hardening=No, Thickness=0.035inch, Voltage Rating=25V, Voltage Rating (DC)=25V, Width=0.031inch
C13: library part CMP-06035-026524-1, "Chip Multilayer Ceramic Capacitors for General Purpose, 0805, 100uF, X5R, 15%, 20%, 2.5V", Capacitance=100uF, Dielectric=X5R, Tolerance=20%, Voltage Rating (DC)=2.5V, Length=2mm, Thickness=1.25mm, Width=1.25mm
C16: library part CMP-07738-136560482-1, "KGM15BR71H104JT Cap Cer 0.1UF 50V X7R 0603", Capacitance=0.1uF, Case/Package=0603, Max Operating Temperature=125°C, Min Operating Temperature=-55°C, Tolerance=5%, Voltage Rating=50V, Height=940µm, Material=Ceramic, NexarPartId=136560482
C18: "No Description Available", Capacitance=1000pF, Mfr_Name=Walsin, Copyright="Copyright (C) 2023 Ultra Librarian. All rights reserved.", Manufacturer_Part_Number=0603N102F500CT, RefDes=RefDes, Type=DEV
C25 C26 C27 C28 C29: Capacitance=1000pF
D1 D2: "Red, Green, Blue (RGB) - LED Indication - Discrete 2V Red, 3V Green, 3V Blue 0606 (1616 Metric)", Package=None, Availability="In Stock", Check_prices=https://www.snapeda.com/parts/B38G3RGB-10D0003H2U1930/Harvatek/view-part/?ref=eda, MF="Harvatek Corporation", MP=B38G3RGB-10D0003H2U1930, Price=None, Purchase-URL=https://pricing.snapeda.com/search/part/B38G3RGB-10D0003H2U1930/?ref=eda, SnapEDA_Link=https://www.snapeda.com/parts/B38G3RGB-10D0003H2U1930/Harvatek/view-part/?ref=snap
J1: Package=None, Availability=Unavailable, MF="{'manufacturer': u'Amphenol ICC (FCI)'}", MP=77313-824-26LF, Price=None
J2: library part CMP-2000-05610-1, "Right Angle Female Type AB Micro USB Connector, 30 V, 1.8 A, -30 to 85 degC, RoHS, Tape and Reel", Color=Black, Current Rating=1.8A, Manufacturer=Molex, Operating Temperature Range=-20Cto+85C, Package Description="Micro USB Connector, Pitch 0.65 mm, 5 Positions, Body 7.5 x 5.6 mm", Voltage Rating=30VAC, Brand=Molex, Connector Type=MicroUSBTypeABreceptacle, Contact Material=CopperAlloy, Contact Plating=Gold, Datasheet URL=http://www.molex.com/webdocs/datasheets/pdf/en-us/0475890001_IO_CONNECTORS.pdf, Datasheet Version=12/2016, Gender=Female, Manufacturer URL=http://www.molex.com/, Mounting Angle=Right, Mounting Technology=SurfaceMount, Number of Contacts=5Contact, Number of Ports=1Port, Package Reference=47589-0001, Package URL=http://www.molex.com/pdm_docs/sd/475890001_sd.pdf, Packaging=Reel, Product=MicroUSBTypeABConnectors, Product Category=USBConnectors, RoHS=True, Series=47589, Standard=USB, Termination Style=SMD/SMT
J3: "No Description Available", Mfr_Name=Sullins, Copyright="Copyright (C) 2023 Ultra Librarian. All rights reserved.", Manufacturer_Part_Number=PPTC111LFBN-RC, RefDes=RefDes, Type=DEV
J4: library part CMP-1502-03324-2, Current Rating=16A, Max Operating Temperature=120°C, Min Operating Temperature=-30°C, Voltage Rating=300V, Contact Material="Nickel, Tin", Height=11.6mm, Lead Pitch=5mm, NexarPartId=78871135, Number of Contacts=2, Number of Pins=2, Number of Rows=1, Packaging=Box, RoHS=Non-Compliant
J5: library part CMP-1502-01332-2, Color=Black, Contact Resistance=20mΩ, Current Rating=3A, Flammability Rating="UL94 V-0", Insulation Resistance=1GΩ, Max Operating Temperature=125°C, Min Operating Temperature=-40°C, Operating Supply Voltage=250V, Connector Type="Header, Socket", Contact Gender=Female, Contact Material=Copper, Contact Plating=Gold, Gender=Female, Height=8.5mm, Housing Material=PBT, Insulation=Insulated, Lead Free="Lead Free", Lead Pitch=2.54mm, Length=25.9mm, Mount="Through Hole", NexarPartId=18818160, Number of Contacts=10, Number of Pins=10, Number of Positions=10, Number of Rows=1, Orientation=Vertical, Pitch=2.54mm, REACH SVHC=Unknown, RoHS=Compliant, Termination="Through Hole", Voltage Rating=250V, Width=25.9mm
LS1: library part CMP-103888-000003-1, "BUZZER MAGNETIC 3V 12MM TH", Frequency=2.3kHz, Max Operating Temperature=70°C, Max Supply Current=30mA, Max Supply Voltage (DC)=4V, Min Operating Temperature=-20°C, Min Supply Voltage (DC)=2V, Nominal Supply Voltage (DC)=3V, Contact Plating=Tin, Diameter=12mm, Height=7.5mm, Input Type=DC, Mount="Through Hole", Operating Supply Current=30mA, Packaging=Tray, Sensing Method=Magnetic, Series=AI, Termination="PC Pins", Voltage Rating=3V
P1: library part CMP-2000-05354-1, "CONN HEADER SMD 10POS 1.27MM (get from Garmin, or order cheaper)", Color=Black, Manufacturer=Samtec, Standard Package=1, Catalog Drawings=FTSHSeriesFTSHSeriesSMTSide, Category=Connectors,Interconnects, Connector Type=Header,Unshrouded, Contact Finish=Gold, Contact Finish Thickness=10µin(0.25µm), Contact Mating Length="0.120\"(3.05mm)", Contact Type=MalePin, Datasheet URL=https://datasheet.ciiva.com/30493/0900766b80adfe36-30493006.pdf, Datasheet Version=Feb-08, EDA / CAD Models=DownloadfromAcceleratedDesigns, Family=RectangularConnectors-Headers,MalePins, Fastening Type=-, Featured Product=Board-To-BoardInterconnectSystems, Features=-, Manufacturer URL=http://www.samtec.com/, Mating Products="FLE-105-01-G-DV-TR-ND-CONNSKT1.27MM10POSDUALSMDCLP-105-02-G-D-P-TR-ND-CONNRCPT10POSDUAL.05\"SMDSFMC-105-L2-S-D-TR-ND-CONN.05\"SURFACE10POSSMTSFMH-105-02-L-D-TR-ND-CONNRECEPT10POS.50\"SMTFLE-105-01-G-DV-A-ND-CONNSKT1.27MM10POSDUALSMDCLP-105-02-G-D-BE-ND-CONNRCPT10POSDUAL.05\"SMDFLE-105-01-G-DV-A-P-ND-CONNSKT1.27MM10POSDUALSMDSAM1153-05-ND-CONNRCPT10POSDUAL.05\"SMDSAM1155-05-ND-CONNRCPT10POSDUAL.05\"SMDSAM1154-05-ND-CONNRCPT10POSDUAL.05\"SMDSFMH-105-02-L-D-LC-ND-CONNRECEPT10POS.50\"SMTSAM1226-05-ND-CONNRCPT.05\"10POSDUALSMD", Mounting Type=SurfaceMount, Number of Positions=10, Number of Positions Loaded=All, Number of Rows=2, Online Catalog=FTSHSeries, Other Names=SAM1161-05, Packaging=Bulk, Pitch="0.050\"(1.27mm)", Product Training Modules=Board-to-BoardConnectors, Row Spacing="0.050\"(1.27mm)", Series=FTSH, Termination=Solder
P2: library part CMP-1502-01064-2, Color=Black, Contact Resistance=20mΩ, Current Rating=3A, Max Operating Temperature=105°C, Min Operating Temperature=-40°C, Operating Supply Voltage=250V, Connector Type="Male Pin", Contact Material=Copper, Contact Mating Length=5.9944mm, Contact Plating=Gold, Gender=Male, Height=8.89mm, Lead Free="Lead Free", Lead Pitch=2.54mm, Mount="Through Hole", NexarPartId=32855522, Number of Contacts=4, Number of Pins=4, Number of Positions=4, Number of Rows=1, Orientation=Vertical, Packaging=Bulk, Pitch=2.54mm, REACH SVHC=Unknown, RoHS=Compliant, Termination=Solder, Voltage Rating=250V
Q1 Q2 Q3 Q4 Q6 Q7 Q8: "No Description Available", Mfr_Name=Nexperia, Copyright="Copyright (C) 2023 Ultra Librarian. All rights reserved.", Manufacturer_Part_Number=NX6008NBKR, RefDes=RefDes, Type=DEV
Q5: library part CMP-1259-00086-1, "P-Channel Trench MOSFET, -50 V, -0.18 A, -55 to 150 degC, 3-Pin SOT23, Tape and Reel", Manufacturer="NXP Semiconductors", Automotive Qualified=Y, Channel Type=P, Code_JEDEC=TO-236AB, ComponentLink1Description="Manufacturer URL", ComponentLink1URL=http://www.nxp.com/, ComponentLink2Description=Datasheet, ComponentLink2URL=http://www.nxp.com/documents/data_sheet/BSS84AK.pdf, ComponentLink3Description="Package Specification", ComponentLink3URL=http://www.nxp.com/documents/outline_drawing/sot023_po.pdf, DatasheetVersion="Rev. 1", ID [max] (A)=-0.18, IDM [max] (A)=-0.7, Mounting Technology="Surface Mount", PackageDescription="3-Pin Small Outline Transistor Package, Body 2.9 x 1.3 mm, Pitch 0.95 mm", PackageReference=SOT23, PackageVersion="06-03-16, 03/2006", Packing="Tape & Reel", PartNumber=BSS84AK,215, VDS [max] (V)=-50, VGSth [typ] (V)=-1.6
R1 R11 R12 R13 R18 R19: library part CMP-2000-06989-2, "100kΩ ±1% 0.1W 0603 Thick Film Chip Resistor AEC-Q200 compliant", Case Code (Imperial)=0603, Case Code (Metric)=1608, Max Operating Temperature=155°C, Max Power Dissipation=100mW, Min Operating Temperature=-55°C, Resistance=100KΩ, Resistor Type="Thick Film", Temperature Coefficient=100ppm/°C, Tolerance=1%, Working Voltage=75V, Case/Package=0603, Construction=Rectangular, Contact Plating=Tin, Depth=0.8mm, Features="Automotive AEC-Q200", Height=0.022inch, Lead Free="Lead Free", Length=1.55mm, Military Standard=Not, Mount="Surface Mount", Number of Terminations=2, Packaging="Tape and Reel", Power Rating=100mW, Radiation Hardening=No, RoHS Compliant=Yes, Series=RMCF, Width=0.031inch
R2: library part CMP-1012-00849-3, "RES SMD 1M OHM 1% 1/10W 0603", Case Code (Imperial)=0603, Case Code (Metric)=1608, Max Operating Temperature=155°C, Max Power Dissipation=100mW, Min Operating Temperature=-55°C, Package Quantity=1, Resistance=1MΩ, Resistance Tolerance=1%, Resistor Type="Thick Film", Temperature Coefficient=100ppm/°C, Voltage Rating=75V, Case/Package=0603, Construction=Rectangular, Contact Plating=Tin, Depth=0.8mm, Features="Automotive AEC-Q200", Height=0.022inch, Lead Free="Lead Free", Length=1.6mm, Military Standard=Not, Mount="Surface Mount", Number of Pins=2, Number of Terminations=2, Packaging="Tape and Reel", Power Rating=100mW, Radiation Hardening=No, REACH SVHC="No SVHC", RoHS Compliant=Yes, Series=ERJ, Size Code=0603, Termination=SMD/SMT, Tolerance=1%, Voltage Rating (DC)=75V, Width=0.8mm
R3 R4 R5 R6 R7: "No Description Available", Mfr_Name="Bourns Electronics", Resistance=2.2K, Copyright="Copyright (C) 2023 Ultra Librarian. All rights reserved.", Manufacturer_Part_Number=CAY16-2201F4LF, RefDes=RefDes, Type=DEV
R8 R9 R15 R16: library part CMP-2000-04286-1, Manufacturer=Yageo, Resistance=60Ω, Part Number=RC0603JR-0762RL
R10 R17: library part CMP-2000-03972-1, Manufacturer=Yageo, Resistance=261Ω, Part Number=RC0603FR-07261RL
R14: library part CMP-03412-001424-1, "RES SMD 127K OHM 1% 1/10W 0603", Manufacturer=Yageo, Package=RT0603, Power Rating=0.1W, Resistance=127KΩ, Temperature="-55°C to +155°C", Temperature Coefficient="50 ppm/°C", Temperature Range High=+155°C, Temperature Range Low=-55°C, Tolerance=0.01, Voltage Rating=75V, Automotive=No, Category=Res, ComponentLink2Description=Datasheet, ComponentLink2URL=http://www.yageo.com/documents/recent/PYu-RT_1-to-0.01_RoHS_L_9.pdf, Composition="Thin Film", Device Class L1="Passive Components", Device Class L2=Resistors, Device Class L3="Chip SMD Resistors", Digikey Description="RES SMD 127K OHM 1% 1/10W 0603", Footprint Url=http://www.yageo.com/exep/pages/download/literatures/PYu-R_Mount_10.pdf, Height=0.55mm, Ipc Land Pattern Name=RESC16080X45, Lead Free=Yes, Manufacturer Part Number=RT0603FRE07127KL, Mouser Description="Thin Film Resistors - SMD 1/10W 127K ohm 1% 50ppm", Octopart=https://octopart.com/rt0603fre07127kl-yageo-1402897, RoHS=TRUE, Series=RT
R20: library part CMP-26527-000011-1, "RES 0 OHM JUMPER 1/10W 0603", Manufacturer=Stackpole, Package=RMCF0603, Power Rating=0.1W, Resistance=0mΩ, Temperature="-55°C to +155°C", Temperature Range High=+155°C, Temperature Range Low=-55°C, Voltage Rating=75V, Automotive=Yes, Automotive Grade="Grade 0", Category=Res, ComponentLink2Description=Datasheet, ComponentLink2URL=https://www.seielect.com/catalog/sei-rmcf_rmcp.pdf, Composition="Thick Film", Device Class L1="Passive Components", Device Class L2=Resistors, Device Class L3="Chip SMD Resistors", Digikey Description="RES 0 OHM JUMPER 1/10W 0603", Height=0.55mm, Ipc Land Pattern Name=RESC15580X45, Lead Free=Yes, Manufacturer Part Number=RMCF0603ZT0R00, Octopart=https://octopart.com/rmcf0603zt0r00-stackpole+electronics-19213618, RoHS=TRUE, Series=RMCF
S1 S2: "6 x 6 mm, 7 mm Actuator Height, 160 gf, Black, Long Crimped, Through Hole, SPST, Tactile Switch", Package=None, Availability="In Stock", Check_prices=https://www.snapeda.com/parts/TS02-66-70-BK-160-LCR-D/CUI+Devices/view-part/?ref=eda, CUI_purchase_URL=https://www.cuidevices.com/product/switches/tactile-switches/ts02-series?utm_source=snapeda.com&utm_medium=referral&utm_campaign=snapedaBOM, MF="CUI Devices", MP=TS02-66-70-BK-160-LCR-D, Price=None, Purchase-URL=https://pricing.snapeda.com/search/part/TS02-66-70-BK-160-LCR-D/?ref=eda, SnapEDA_Link=https://www.snapeda.com/parts/TS02-66-70-BK-160-LCR-D/CUI+Devices/view-part/?ref=snap
SW1: library part CMP-1696-00002-1, "Slide Switch, 500 V, -20 to 70 degC, 3-Pin THD, RoHS", Case\Package=SOT-23-5, Dropout Voltage="300 mV", Max Input Voltage="8 V", Max Operating Temperature="85 degC", Max Ouput Current="150 mA", Max Power Dissipation="250 mW", Min Input Voltage="4.3 V", Min Operating Temperature="-40 degC", Nominal Output Voltage="3.3 V", Package Quantity=3000, ComponentLink1Description="Manufacturer URL", ComponentLink1URL=http://www.e-switch.ch/en/, ComponentLink2Description=Datasheet, ComponentLink2URL=https://www.e-switch.com/system/asset/product_line/data_sheet/119/EG.pdf, DatasheetVersion=Oct-15, Height="1.3 mm", Length="3 mm", Mount="Surface Mount", Output Current="150 mA", Output Voltage="3.3 V", Outputs=1, PackageDescription="3-Pin Through Hole Device, Body 11.6 x 4 mm, Pitch 2.5 mm", PackageReference=EG1218, Packaging="Tape and Reel", Pins=5, Power Rating="250 mW", Radiation Hardening=No, REACH SVHC="No SVHC", RoHSCompliant=true, Width="1.8 mm"
U1: "No Description Available", Mfr_Name=Fanstel, Copyright="Copyright (C) 2023 Ultra Librarian. All rights reserved.", Manufacturer_Part_Number=BT40, RefDes=RefDes, Type=RF
U2: library part CMP-0065-00076-3, "Switched Capacitor Voltage Converter, 6-pin SOT-23, Pb-Free", Manufacturer="Texas Instruments", PackageTopMarking=S03A*XTT, PowerWise=N, Code_IPC=SOT26A-6, Code_JEDEC=MO-178-AB, ComponentLink1Description="Datasheet URL", ComponentLink1URL=http://www.ti.com/general/docs/lit/getliterature.tsp?genericPartNumber=LM2664&fileType=pdf, CompType="Switch Caps", PackageDescription="Molded SOT-23, .115 x .063 x .040in Body, 6 Lead, .0375in in Pitch", PackageReference=DBV0006A, PinCount=6, RoHS=Y
U3: library part CMP-0394-00292-2, "Single Output High PSRR LDO, 200 mA, Fixed -2.5 V Output, -10 to -2.7 V Input, 5-pin SOT-23 (DBV), -40 to 125 degC, Green (RoHS & no Sb/Br)", Manufacturer="Texas Instruments", Accuracy(%)=2, Code_JEDEC=MO-178, ComponentLink1Description="Manufacturer URL", ComponentLink1URL=http://www.ti.com/, ComponentLink2Description=Datasheet, ComponentLink2URL=http://www.ti.com/general/docs/lit/getliterature.tsp?genericPartNumber=TPS72325&fileType=pdf, ComponentLink3Description="Package Specification", ComponentLink3URL=http://www.ti.com/litv/pdf/mpds018i, DatasheetVersion=SLVS346B, Eco-Plan="Green (RoHS & no Sb/Br)", Fixed Output Options(V)=-2.5, Iout(Max)(A)=0.2, Iq(Typ)(mA)=0.13, Mounting Technology="Surface Mount", PackageDescription="5-Pin Plastic Small Outline, Body 1.60 Ãƒâ€” 2.90 mm, Pitch 0.95 mm", PackageReference=DBV0005A, PackageVersion=4073253-4/K, PartNumber=TPS72325DBVR, SubFamily="Single Channel LDO", Vdo(Typ)(mV)=280, Vin(Max)(V)=-2.7, Vin(Min)(V)=-10, Vout Adj(Max)(V)=-2.5, Vout Adj(Min)(V)=-2.5
U4: library part CMP-06324-000081-1, "IC REG LINEAR 2.5V 300MA SOT23-5", Case/Package=SOT-23-5, Dropout Voltage=160mV, Max Operating Temperature=125°C, Min Current Limit=400mA, Min Operating Temperature=-40°C, Output Current=300mA, Output Voltage=2.5V, Mount="Surface Mount", Number of Regulators=1, Packaging="Cut Tape"
U5: library part CMP-0136-01150-1, "150 mA, 16 V, High Performance LDO, -40 to 125 degC, 5-pin SOT-23 (OT5), Tape and Reel", Manufacturer=Microchip, ComponentLink1Description="Manufacturer URL", ComponentLink1URL=http://www.microchip.com, ComponentLink2Description=Datasheet, ComponentLink2URL=http://ww1.microchip.com/downloads/en/DeviceDoc/22276A.pdf, ComponentLink3Description="Package Specification", ComponentLink3URL=http://www.microchip.com/stellent/groups/techpub_sg/documents/packagingspec/en012702.pdf, ComponentLink4Description="Product URL", ComponentLink4URL=http://www.microchip.com/MCP1754, DatasheetVersion="Rev. A", Mounting Technology="Surface Mount", PackageDescription="5-Lead Plastic Small Outline Transistor, 2.9 x 1.55 mm Body, 0.95 mm Pitch", PackageReference=SOT-23-OT5, PackageVersion=C04-091B, PartNumber=MCP1754T-3302E/OT
U6: library part CMP-0841-00001-2, "Low-Noise, 8-Channel, 24-Bit Analog Front-End for Biopotential Measurement, 16 KSPS, -40 to 85 degC, 64-Pin PQFP (PAG-64), RoHS, Tape and Reel", Manufacturer="Texas Instruments", Operating Temperature Range (C)="-40 to 85", # Input Channels=8, Architecture=Delta-Sigma, ComponentLink1Description="Manufacturer URL", ComponentLink1URL=http://www.ti.com/, ComponentLink2Description=Datasheet, ComponentLink2URL=http://www.ti.com/lit/ds/symlink/ads1299.pdf, ComponentLink3Description="Package Specification", ComponentLink3URL=http://www.ti.com/lit/ml/mtqf006a/mtqf006a.pdf, DatasheetVersion=SBAS499A, Interface="Serial SPI", Mounting Technology="Surface Mount", PackageDescription="64-Pin Plastic Quad Flatpack, Body 10 x 10 mm, Pitch 0.5 mm", PackageReference=PAG-64, PackageVersion=4040282/C, Packing=PAG0064A, PartNumber=ADS1299IPAGR, Reference Mode="Int, Ext", Resolution (Bits)=24, RoHS=TRUE, Sample Rate (max) (KSPS)=16
U7 U8 U9 U10 U11 U12: "No Description Available", Mfr_Name="Texas Instruments", Copyright="Copyright (C) 2023 Ultra Librarian. All rights reserved.", Manufacturer_Part_Number=TPD4E1B06DCKR, RefDes=RefDes, Type=DEV

## Free pads (board coordinates)
  round 0 hole 3: 2(35.433,77.851) 2(35.687,22.479) 2(94.615,22.352) 2(94.869,77.978)

## Via types
v1: diameter 0.6, hole 0.3, Top Layer to Bottom Layer, tented both sides, 129 vias

## Nets (pads, with @x,y where several pads share a name; then routed paths per layer and width w, separated by ;. In a path a pad name is that pad's centre, name@x,y a point inside that pad or via, vN(x,y) a via of type N, cw(c..) or ccw(c..) an arc to the next point about the centre after c; other vN are vias at no path point)
1N: J1.21 R7.1 U10.4 | length 13.5
  Top Layer w0.152: J1.21@33.782,34.798 34.037,35.053 34.836,35.053 35.812,36.029 36.996,36.029 38.602,34.423 U10.4@39.482,34.423 39.482,33.67 39.878,33.274 40.513,33.274 42.697,31.09 44.044,31.09 R7.1@44.196,30.937
1P: J1.22 R7.2 U11.1 | length 10.4
  Top Layer w0.152: J1.22@36.322,34.798 36.524,34.596 37.794,34.596 39.497,32.893 40.259,32.893 40.782,32.37 U11.1@40.782,31.617 40.854,31.545 41.099,31.545 42.854,29.79 R7.2@44.196,29.79
2N: J1.19 R6.3 U10.2 | length 12.9
  Top Layer w0.152: J1.19@33.782,37.338 34.037,37.593 34.836,37.593 35.812,38.569 38.775,38.569 40.106,37.238 40.106,36.723 U10.2@40.132,36.697 40.132,36.068 40.89,35.31 R6.3@44.196,35.31
2P: J1.20 R6.4 U10.5 | length 10.6
  Top Layer w0.152: J1.20@36.322,37.338 36.397,37.263 37.286,37.263 38.862,35.687 39.751,35.687 40.132,35.306 U10.5@40.132,34.423 40.132,33.782 40.335,33.579 41.961,33.579 42.545,34.163 R6.4@44.196,34.163
3N: J1.17 R6.1 U9.4 | length 12.7
  Top Layer w0.152: J1.17@33.782,39.878 35.013,41.109 37.123,41.109 38.729,39.503 U9.4@39.482,39.503 39.558,39.427 39.558,39.055 39.653,38.96 39.653,38.953 39.829,38.776 39.837,38.776 41.326,37.287 R6.1@44.196,37.287
3P: J1.18 R6.2 U10.1 | length 9.7
  Top Layer w0.152: J1.18@36.322,39.878 37.211,38.989 38.989,38.989 40.718,37.26 40.718,36.761 U10.1@40.782,36.697 42.412,36.697 42.968,36.14 R6.2@44.196,36.14
4N: J1.15 R5.3 U9.2 | length 13.1
  Top Layer w0.152: J1.15@33.782,42.418 35.013,43.649 38.647,43.649 40.018,42.278 40.018,41.891 U9.2@40.132,41.777 40.132,41.215 40.707,40.64 42.291,40.64 43.311,41.66 R5.3@44.196,41.66
4P: J1.16 R5.4 U9.5 | length 10.8
  Top Layer w0.152: J1.16@36.322,42.418 37.592,42.418 39.37,40.64 39.751,40.64 40.132,40.259 U9.5@40.132,39.503 40.208,39.427 40.208,39.025 40.498,38.735 41.771,38.735 43.549,40.513 R5.4@44.196,40.513
5N: J1.13 R5.1 U8.4 | length 12.4
  Top Layer w0.152: J1.13@33.782,44.958 35.013,46.189 36.832,46.189 38.438,44.583 U8.4@39.482,44.583 39.596,44.469 39.596,44.067 40.229,43.434 43.993,43.434 R5.1@44.196,43.637
5P: J1.14 R5.2 U9.1 | length 9.8
  Top Layer w0.152: J1.14@36.322,44.958 37.1,44.18 38.878,44.18 40.74,42.318 40.74,41.819 U9.1@40.782,41.777 42.107,41.777 42.82,42.49 R5.2@44.196,42.49
6N: J1.11 R4.3 U8.2 | length 13.4
  Top Layer w0.152: J1.11@33.782,47.498 34.037,47.753 34.836,47.753 35.812,48.729 37.293,48.729 38.397,47.625 39.878,47.625 40.105,47.398 40.105,46.884 40.246,46.742 40.246,46.34 40.612,45.974 41.402,45.974 43.438,48.01 R4.3@44.196,48.01
6P: J1.12 R4.4 U8.5 | length 11.4
  Top Layer w0.152: J1.12@36.322,47.498 38.1,45.72 39.751,45.72 40.132,45.339 U8.5@40.132,44.583 40.246,44.469 40.246,44.067 40.498,43.815 41.3,43.815 44.196,46.711 R4.4@44.196,46.863
7N: J1.09 R4.1 U7.4 | length 13.1
  Top Layer w0.152: J1.09@33.782,50.038 34.037,50.293 34.836,50.293 35.812,51.269 36.832,51.269 38.076,50.025 39.368,50.025 39.482,49.911 U7.4@39.482,49.663 39.596,49.549 39.596,49.147 40.229,48.514 41.91,48.514 43.231,49.835 44.044,49.835 R4.1@44.196,49.987
7P: J1.10 R4.2 U8.1 | length 10.3
  Top Layer w0.152: J1.10@36.322,50.038 36.415,50.038 37.431,49.022 39.116,49.022 40.74,47.398 40.74,46.899 U8.1@40.782,46.857 41.269,46.857 43.252,48.84 R4.2@44.196,48.84
8N: J1.07 R3.3 U7.2 | length 15
  Top Layer w0.152: J1.07@33.782,52.578 35.013,53.809 38.662,53.809 40.018,52.453 40.018,52.051 U7.2@40.132,51.937 40.132,51.308 40.513,50.927 41.275,50.927 42.456,52.108 42.456,53.505 43.311,54.36 R3.3@44.196,54.36
8P: J1.08 R3.4 U7.5 | length 12.6
  Top Layer w0.152: J1.08@36.322,52.578 38.157,50.743 39.681,50.743 40.132,50.292 U7.5@40.132,49.663 40.246,49.549 40.246,49.147 40.498,48.895 41.275,48.895 41.91,49.53 41.91,50.927 R3.4@44.196,53.213
-DVDD: C1.1 C3.1 U2.2 U3.2 U3.3 | length 9.4
  Top Layer w0.127: C3.1@59.444,62.738 C3.1@59.452,62.73
  Top Layer w0.635: U2.2@53.61,64.008 C1.1@55.642,64.008 56.896,64.008 58.166,62.738 C3.1@59.444,62.738 ; C3.1@59.452,62.73 U3.2@61.498,62.73 U3.3@61.498,61.78
AFE2CS: J5.1 U1.Z3 | length 68.2
  Top Layer w0.152: v1(74.041,66.929) 74.041,68.707 74.133,68.799 74.175,68.855 cw(c74.677,68.474) 74.297,68.976 74.351,69.017 75.758,70.424 75.758,73.6 U1.Z3@76.949,74.791
  Bottom Layer w0.152: v1(74.041,66.929) 74.041,64.897 74.93,64.008 80.264,64.008 91.821,52.451 91.821,35.306 83.693,27.178 83.693,24.511 J5.1@85.725,22.479
AFE2MISO: J5.3 U1.Z1 | length 72.3
  Top Layer w0.152: v1(72.77,66.93) 72.771,66.931 72.771,68.453 75.149,70.831 75.149,75.391 U1.Z1@76.949,77.191
  Bottom Layer w0.152: v1(72.77,66.93) 72.77,63.755 74.041,62.484 80.772,62.484 91.059,52.197 91.059,35.814 82.677,27.432 82.677,24.511 J5.3@80.645,22.479
AFE2MOSI: J5.4 U1.Z0 | length 75.1
  Top Layer w0.152: v1(72.136,68.198) 72.222,68.284 72.222,68.529 74.803,71.11 74.803,76.245 U1.Z0@76.949,78.391
  Bottom Layer w0.152: v1(72.136,68.198) 72.136,63.373 73.787,61.722 81.103,61.722 90.678,52.147 90.678,36.068 82.169,27.559 82.169,26.543 J5.4@78.105,22.479
AFE2SCK: J5.2 U1.Z2 | length 69.3
  Top Layer w0.152: v1(73.407,68.198) 73.437,68.228 73.437,68.611 75.454,70.628 75.454,74.496 U1.Z2@76.949,75.991
  Bottom Layer w0.152: v1(73.407,68.198) 73.407,64.515 74.676,63.246 80.518,63.246 91.44,52.324 91.44,35.56 83.185,27.305 J5.2@83.185,22.479
AFECS: U1.A6 U6.39 | length 34.9
  Top Layer w0.152: U6.39@71.213,41.291 74.567,41.291 75.362,42.086 75.362,45.39 75.565,45.593 75.565,52.197 77.851,54.483 77.851,68.961 78.449,69.559 U1.A6@78.449,71.191
AFEMISO: U1.E6 U6.43 | length 37.5
  Top Layer w0.152: U6.43@71.213,43.291 71.268,43.236 74.476,43.236 v1(74.531,43.18) ; v1(77.597,43.561) 77.597,44.831 77.089,45.339 77.089,50.927 79.375,53.213 79.375,61.992 84.449,67.066 U1.E6@84.449,71.191
  Bottom Layer w0.152: v1(74.531,43.18) 77.216,43.18 v1(77.597,43.561)
AFEMOSI: U1.11 U6.34 | length 51.7
  Top Layer w0.152: U6.34@71.213,38.791 72.207,38.791 73.66,37.338 76.708,37.338 78.232,38.862 78.232,44.958 77.47,45.72 77.47,50.673 79.742,52.945 79.742,61.327 83.668,65.253 v1(84.495,65.253) ; v1(87.122,65.405) 87.63,65.405 89.027,66.802 89.027,73.152 88.488,73.691 U1.11@87.468,73.691
  Bottom Layer w0.152: v1(84.495,65.253) 84.571,65.329 87.046,65.329 v1(87.122,65.405)